# Altium PCB BACK1.1.PcbDoc
Units mil, origin at the board's own origin, x right, y up, seen from the top; angles counter-clockwise.
Board outline 3149.61 x 3149.61 mil, 2 copper layers (Top Layer, Bottom Layer); 22 components, 39 nets, 164 pads, 8 vias.
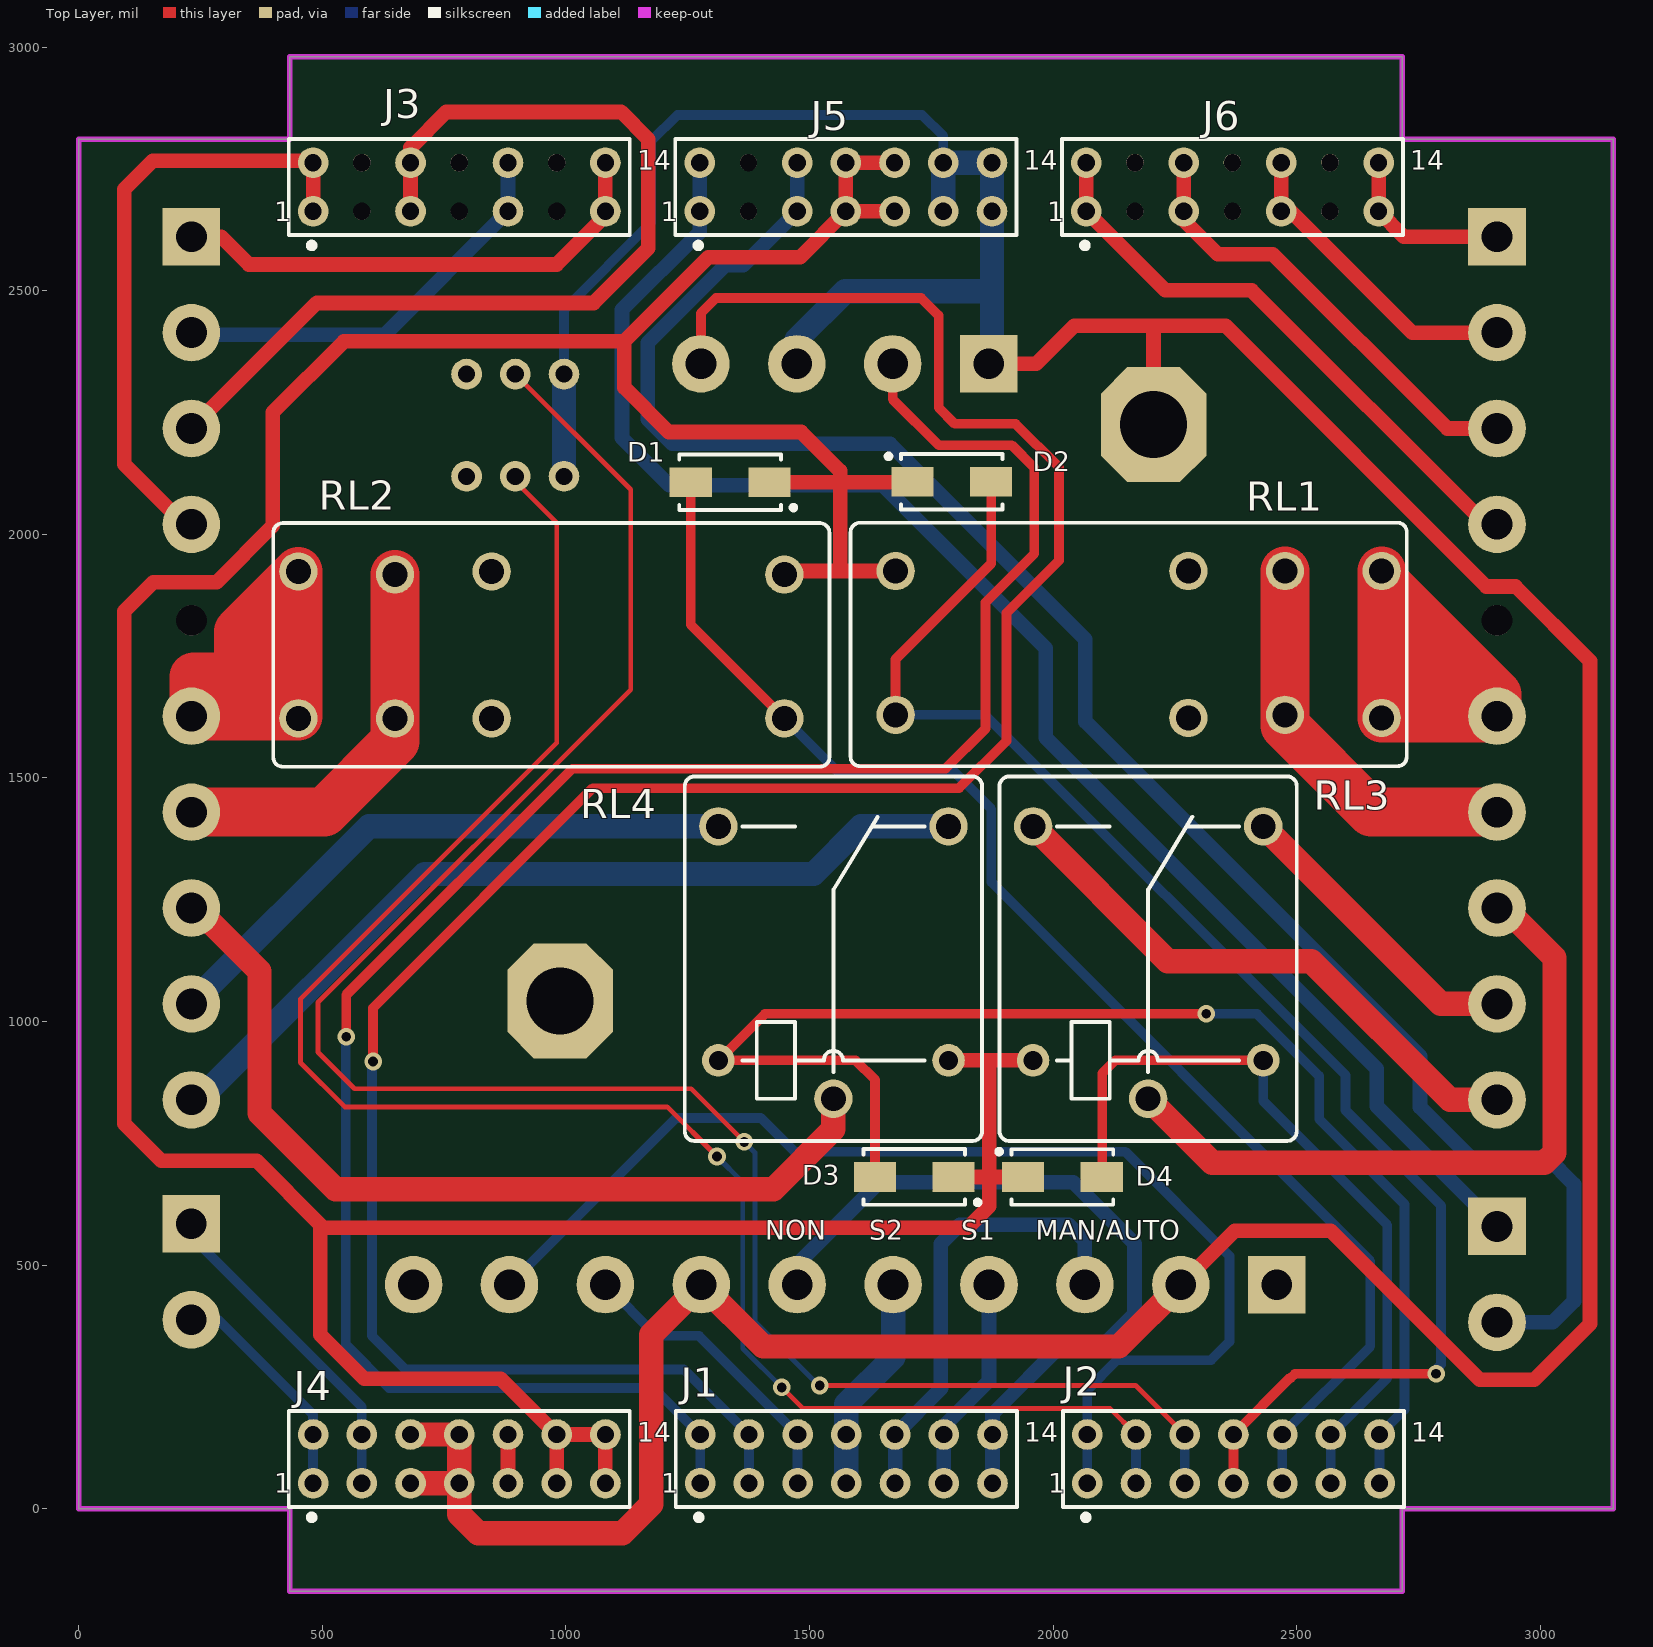
[diagram p0: Top Layer view]
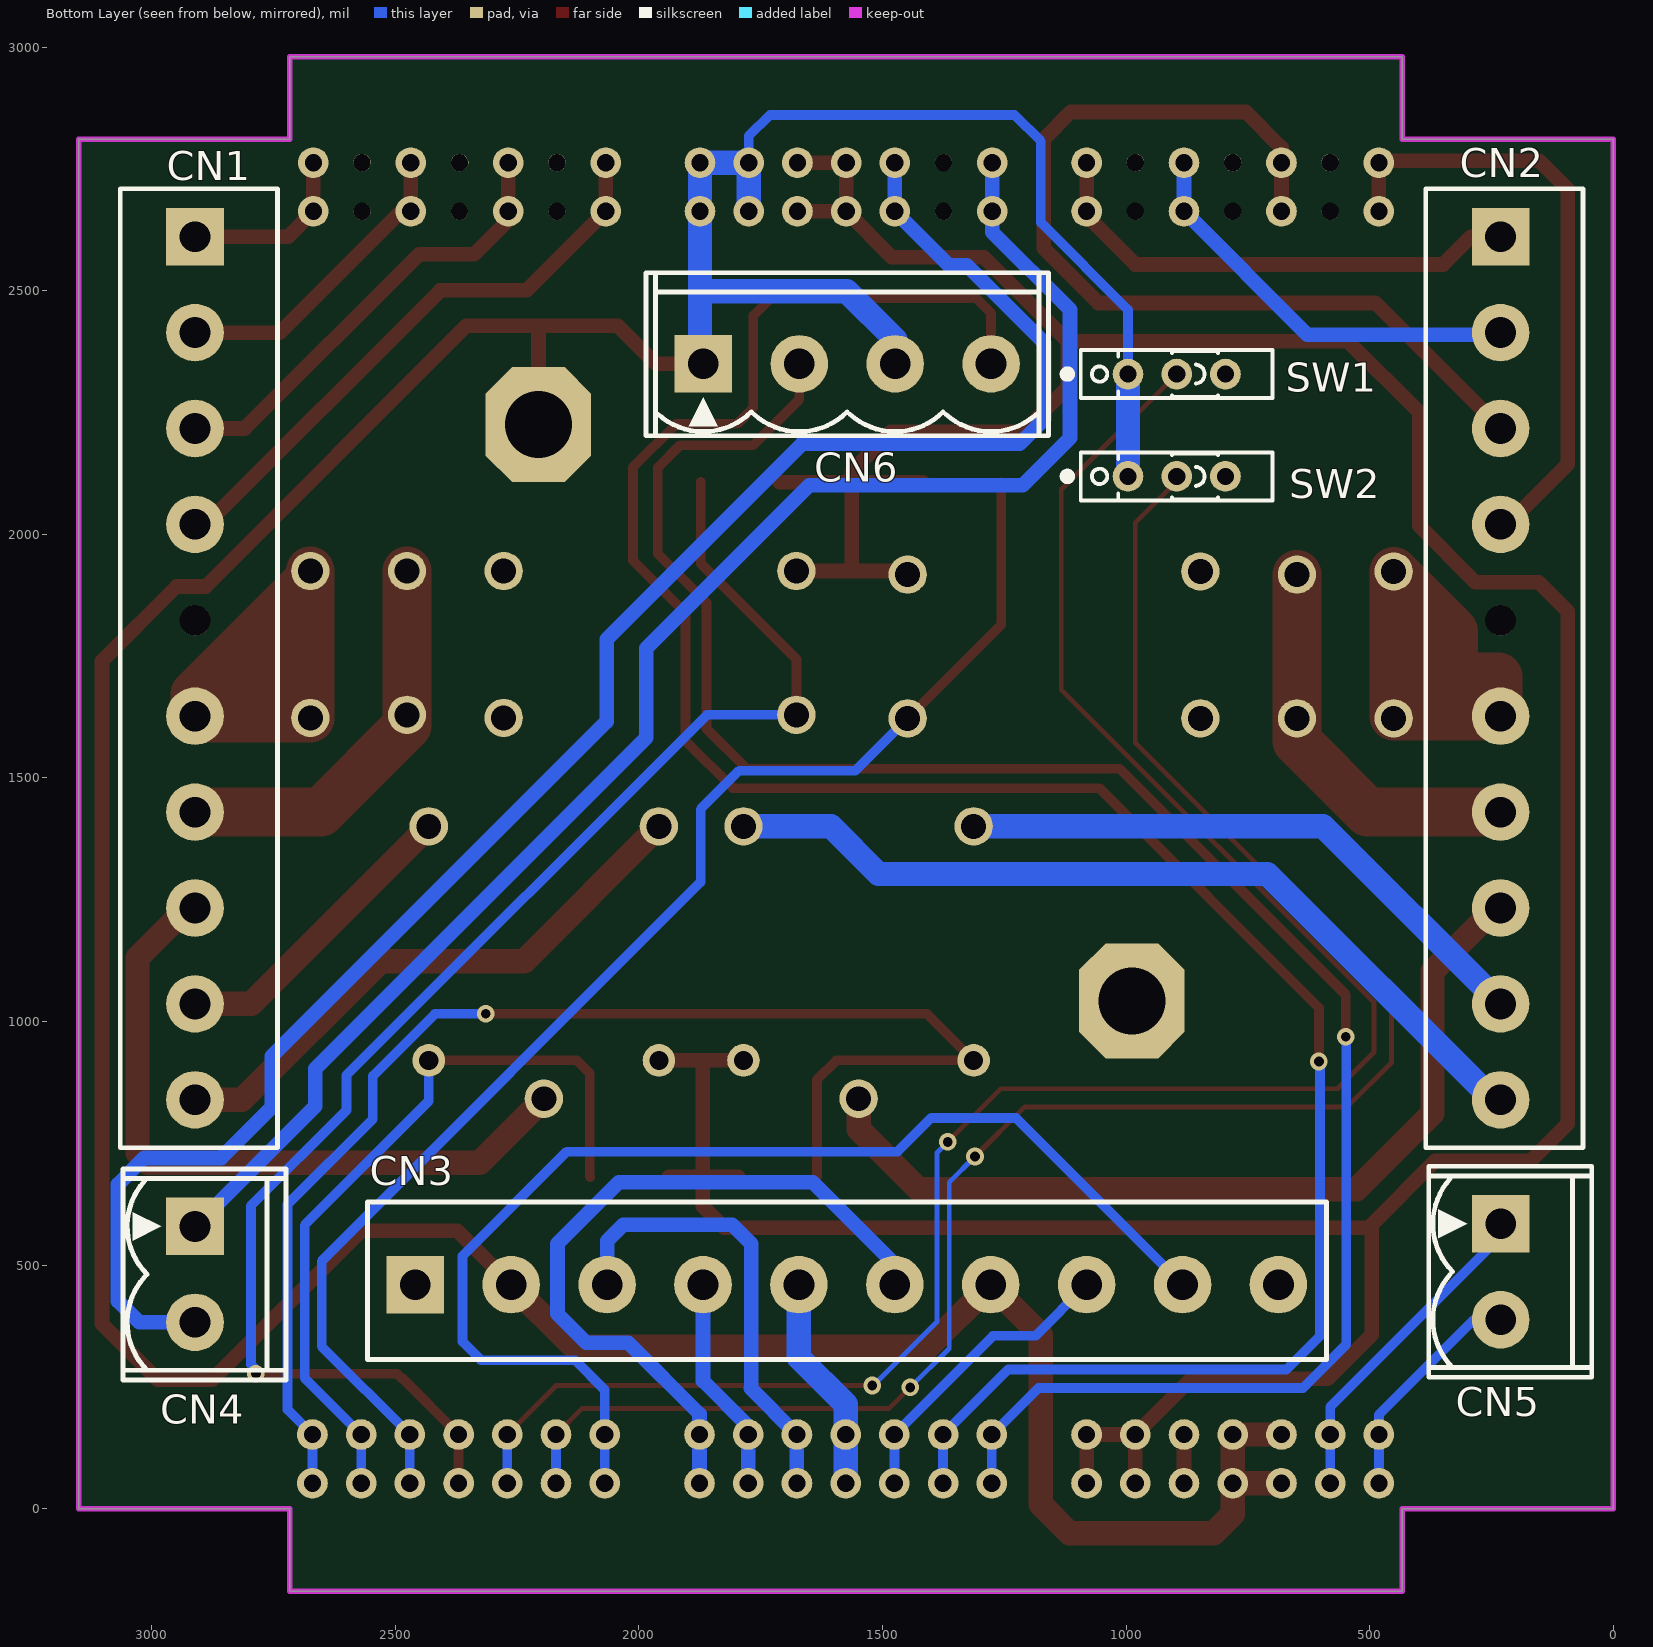
[diagram p1: Bottom Layer view, seen from below]
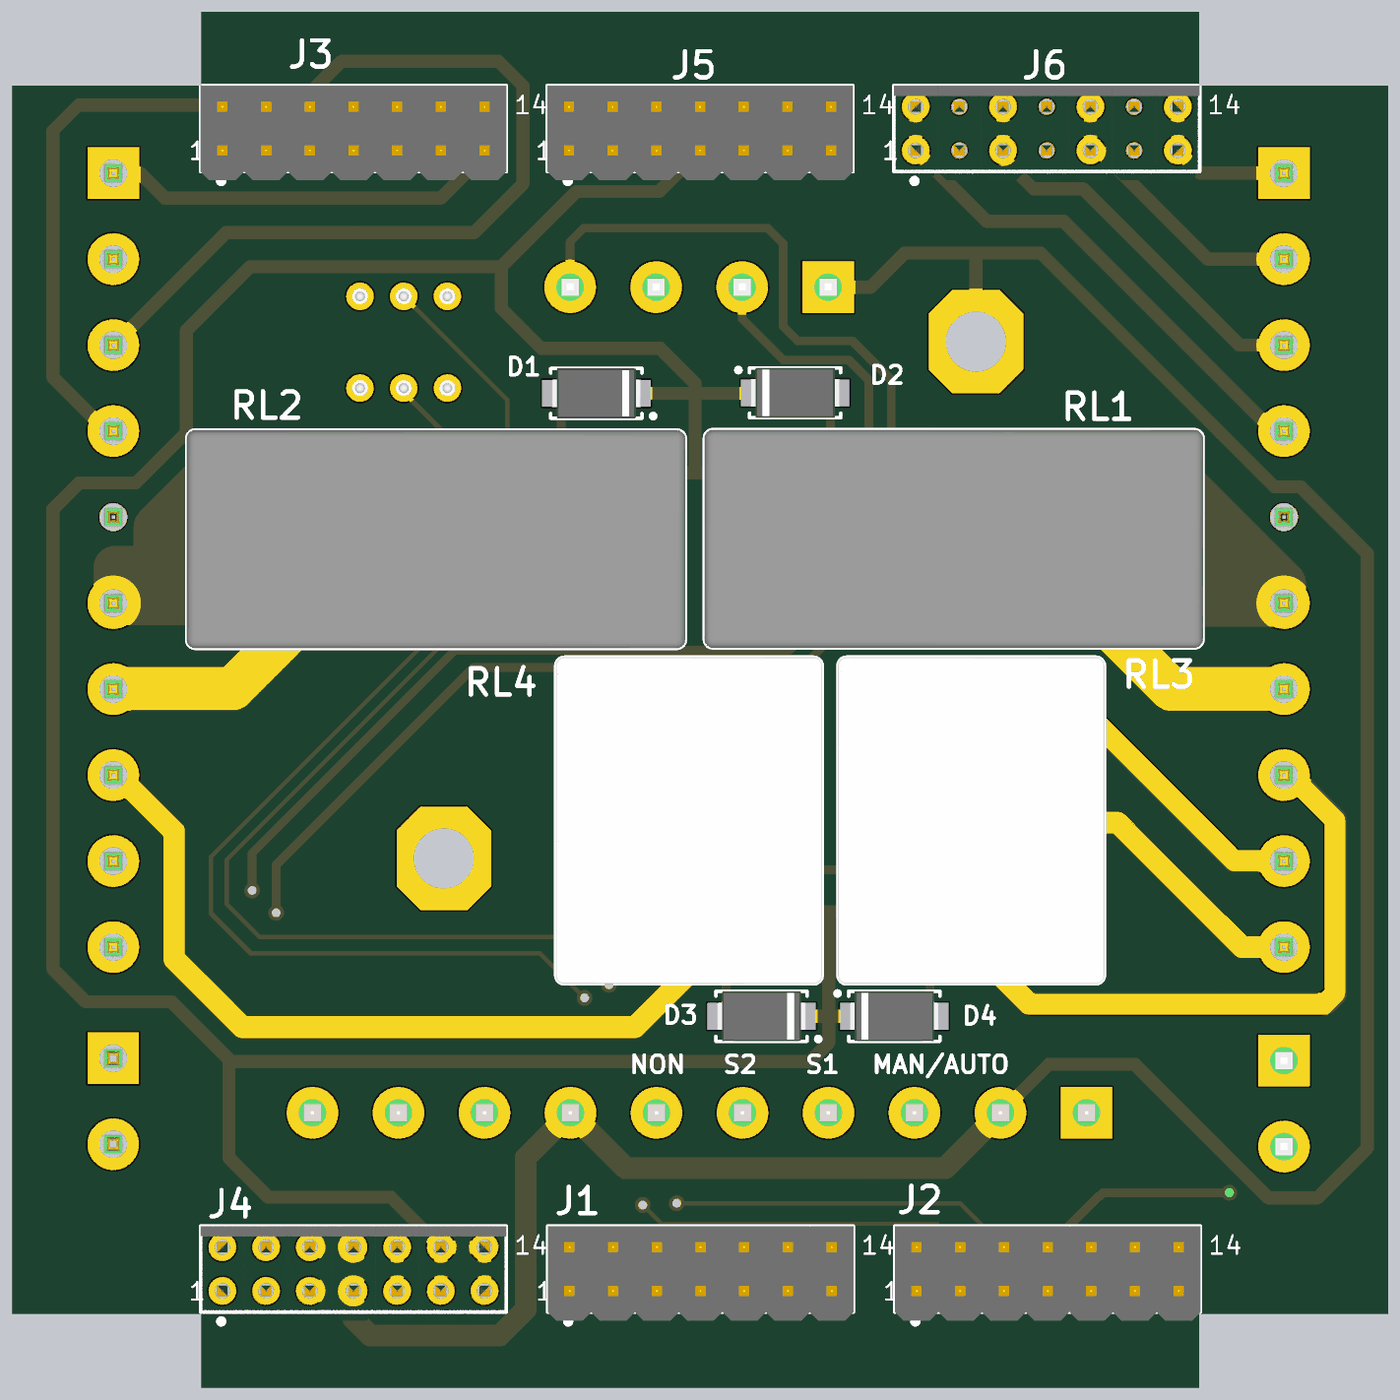
[diagram p2: 3D render of the assembled board from above, using the file's embedded part models]
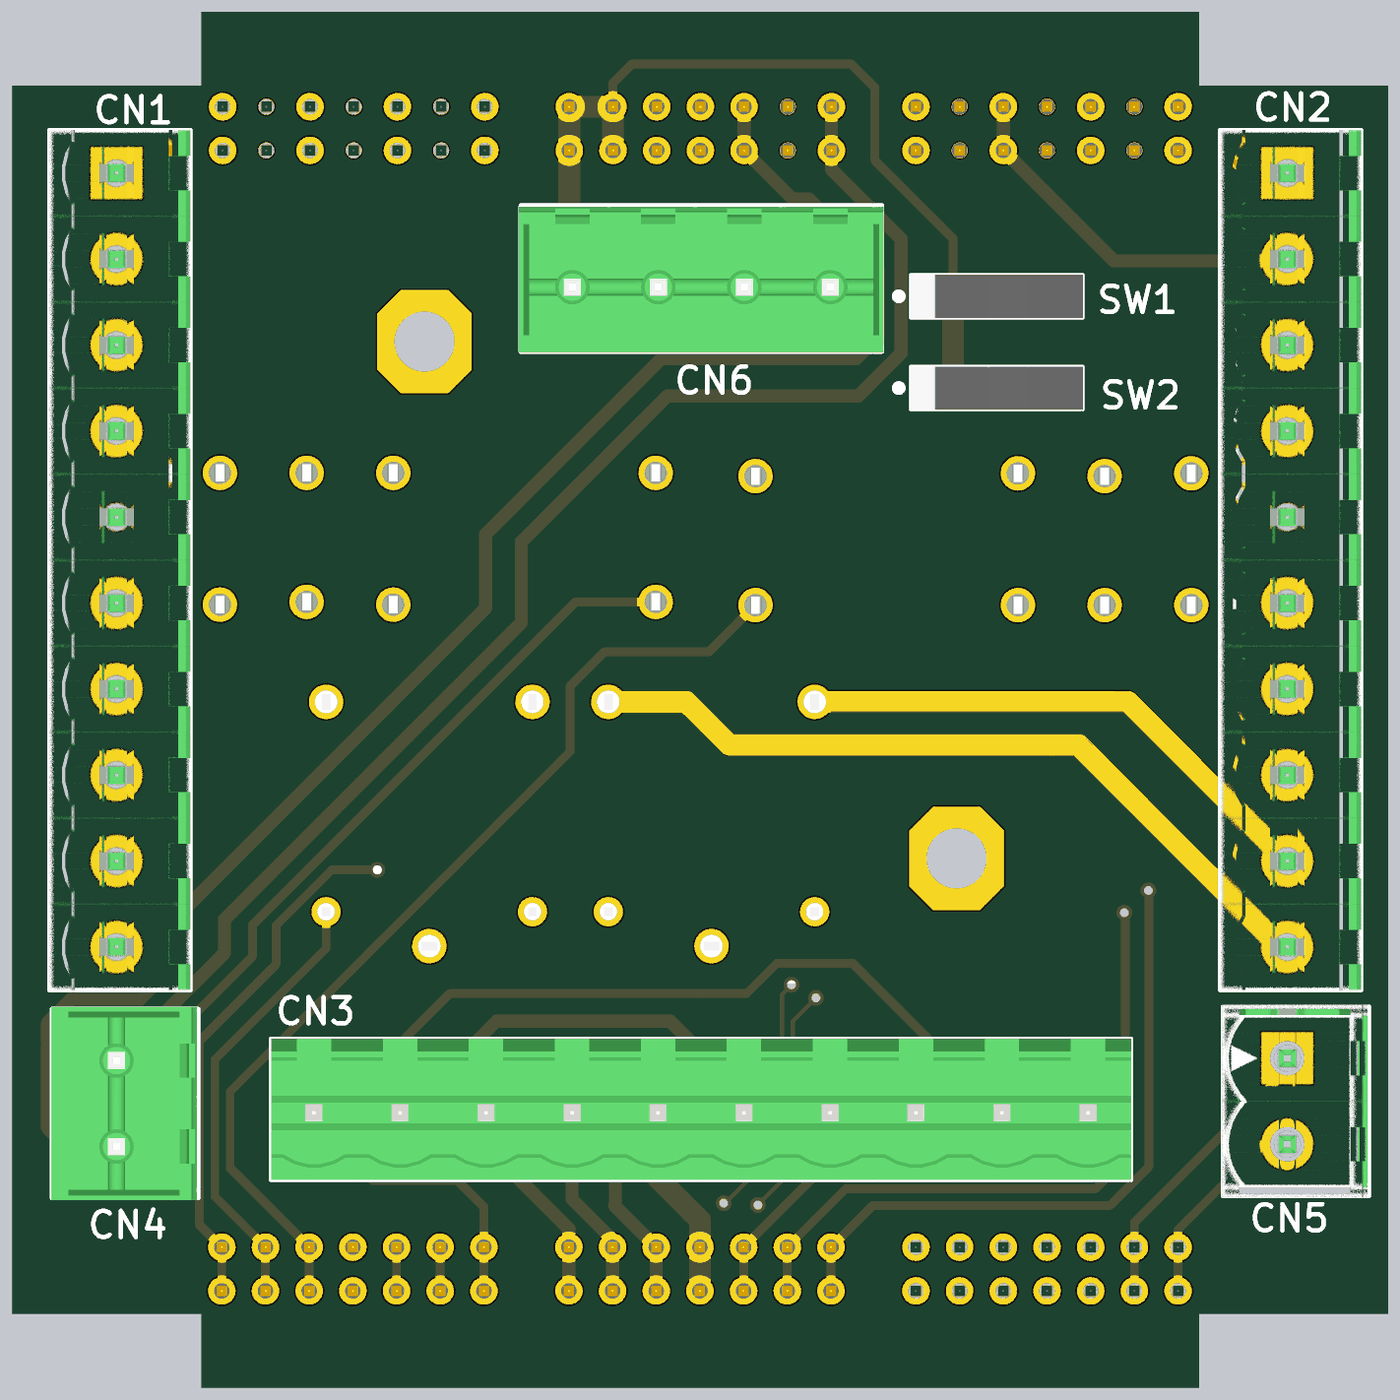
[diagram p3: 3D render of the assembled board from below, using the file's embedded part models]

## Layer stack, top to bottom
Top Solder: solder mask 0.4, Solder Resist, Dk 3.5
Top Layer: signal copper 1.4
Dielectric 1: dielectric 12.6, FR-4, Dk 4.8
Bottom Layer: signal copper 1.4
Bottom Solder: solder mask 0.4, Solder Resist, Dk 3.5

## Board outline
0,0 0,2811.02 433.07,2811.02 433.07,2980.31 2716.54,2980.31 2716.54,2811.02 3149.61,2811.02 3149.61,0 2716.54,0 2716.54,-169.29 433.07,-169.29 433.07,0

## Design rules (kind name [scope] priority, off if disabled: settings)
Clearance [All] p1: gap=15 ignorepadtopadclearanceinfootprint=FALSE
PolygonConnect [All] p1: connectstyle=Relief reliefconductorwidth=10 reliefentries=4 polygonreliefangle="90 Angle" airgapwidth=10
RoutingVias [All] p1: holewidth=28 width=50 viastyle="Through Hole" minholewidth=28 minwidth=50 maxholewidth=28 maxwidth=50
SolderMaskExpansion [All] p1: expansion=4
Width [All] p1: maxlimit=300 minlimit=10 preferedwidth=20
30 further rules are at their usual default settings.

## Components (designator, comment, footprint, x,y, rotation, side; value= is the part's Value field where it differs from the comment)
CN1 "2EDGV-5.0-10P-14-00A(H)" 0330-0097-8_2EDGV-5.0-10P-14-00A(H)#1 2910.98,2611.02 r270 bottom locked
CN2 "2EDGV-5.0-10P-14-00A(H)" 0330-0097-8_2EDGV-5.0-10P-14-00A(H)#1 231.26,2611.02 r270 bottom locked
CN3 "2EDGV-5.0-10P-14-00A(H)" 0330-0097-8_2EDGV-5.0-10P-14-00A(H)#2 2458.86,460 r180 bottom locked
CN4 "5EHDVC-2P" 0005-0113-3_5EHDVC-2P 2910.98,579.53 r270 bottom locked
CN5 "5EHDVC-2P" 0005-0113-3_5EHDVC-2P 231,584.85 r270 bottom locked
CN6 "Comment" 0005-0143-5_5EHDVC-4P 1867.55,2350 r180 bottom locked
D1 "M7" DIOM5027X244N 1337,2107 r180 top
D2 "M7" DIOM5027X244N 1792,2108 r0 top (schematic designator D1)
D3 "M7" DIOM5027X244N 1715,681 r180 top (schematic designator D1)
D4 "M7" DIOM5027X244N 2019,681 r0 top (schematic designator D1)
J1 "Header 14" COMATEL_389.0358.1.14.400#1 1575.5,102.36 r0 top locked
J2 "Header 14" COMATEL_389.0358.1.14.400#1 2370,102.36 r0 top locked
J3 "Header 14" COMATEL_389.0358.1.14.400#2 780.98,2712.99 r0 top locked
J4 "Header 14" COMATEL_389.0358.1.14.400#1 781,102.36 r0 top locked
J5 "Header 14" COMATEL_389.0358.1.14.400#3 1574.49,2712.99 r0 top locked
J6 "Header 14" COMATEL_389.0358.1.14.400#2 2368,2712.99 r0 top locked
RL1 "12VDC" REL_TYCO_SCHRACK_RT31XXXX 2155,1774 r0 top
RL2 "12VDC" REL_TYCO_SCHRACK_RT31XXXX 970,1773 r180 top
RL3 "5VDC" REL_FINDER_36.11 2195,1129 r90 top
RL4 "5VDC" REL_FINDER_36.11 1549,1129 r90 top
SW1 "Comment" SW_EAO_1K2-09.032 896,2329 r90 bottom
SW2 "Comment" SW_EAO_1K2-09.032 896,2119 r90 bottom

## Footprints (in the part's own frame and the unit in brackets; to place one, negate y for a bottom-side part, rotate by r counter-clockwise, add the part's x,y. Pads: shape width x height; smd on the part's side, far side on the other; paste and mask are expansions set on the pad)
0005-0113-3_5EHDVC-2P [mm] "Plug-in Terminal Block 2pins,Male,300V/15A  Pitch 5.00mm"
  rect 3x3 hole 1.6: 1(0,0)
  round 3 hole 1.6: 2(5,0)
  silkscreen extent -3,-3.75 8,4.75, body extent -3.1,-3.8 8.1,4.67, height 12.1
0005-0143-5_5EHDVC-4P [mm] "Plug-in Terminal Block 4pins,Male,300V/15A  Pitch 5.00mm"
  rect 3x3 hole 1.6: 1(0,0)
  round 3 hole 1.6: 2(5,0) 3(10,0) 4(15,0)
  silkscreen extent -3,-3.75 18,4.75, body extent -3.1,-3.8 18.1,4.67, height 12.1
0330-0097-8_2EDGV-5.0-10P-14-00A(H)#1 [mm] "Plug-in Terminal Block 10pins,Male,300V/15A  Pitch 5.0mm"
  rect 3x3 hole 1.6: 1(0,0)
  round 3 hole 1.6: 2(5,0) 3(10,0) 4(15,0) 6(25,0) 7(30,0) 8(35,0) 9(40,0) 10(45,0)
  round 1.575 hole 1.6: 5(20,0)
  silkscreen extent -2.5,-3.9 47.5,4.3, body extent -2.5,-3.9 47.5,4.3, height 12.2
0330-0097-8_2EDGV-5.0-10P-14-00A(H)#2 [mm] "Plug-in Terminal Block 10pins,Male,300V/15A  Pitch 5.0mm"
  rect 3x3 hole 1.6: 1(0,0)
  round 3 hole 1.6: 2(5,0) 3(10,0) 4(15,0) 5(20,0) 6(25,0) 7(30,0) 8(35,0) 9(40,0) 10(45,0)
  silkscreen extent -2.5,-3.9 47.5,4.3, body extent -2.5,-3.9 47.5,4.3, height 12.2
COMATEL_389.0358.1.14.400#1 [mm] "14 Contacts - Pitch 2.54mm - Dual Row Straight Strip Header - Insulator 1.7mm"
  round 1.6 hole 0.9: 1(-7.62,-1.27) 2(-7.62,1.27) 3(-5.08,-1.27) 4(-5.08,1.27) 5(-2.54,-1.27) 6(-2.54,1.27) 7(0,-1.27) 8(0,1.27) 9(2.54,-1.27) 10(2.54,1.27) 11(5.08,-1.27) 12(5.08,1.27) 13(7.62,-1.27) 14(7.62,1.27)
  silkscreen extent -8.89,-3.2 8.89,2.5, body extent -8.89,-3 8.89,2.5, height 8
COMATEL_389.0358.1.14.400#2 [mm] "14 Contacts - Pitch 2.54mm - Dual Row Straight Strip Header - Insulator 1.7mm"
  round 1.6 hole 0.9: 1(-7.62,-1.27) 2(-7.62,1.27) 5(-2.54,-1.27) 6(-2.54,1.27) 9(2.54,-1.27) 10(2.54,1.27) 13(7.62,-1.27) 14(7.62,1.27)
  round 0.889 hole 0.9: 3(-5.08,-1.27) 7(0,-1.27) 11(5.08,-1.27)
  round 0.914 hole 0.9: 4(-5.08,1.27) 8(0,1.27) 12(5.08,1.27)
  silkscreen extent -8.89,-3.2 8.89,2.5, body extent -8.89,-3 8.89,2.5, height 8
COMATEL_389.0358.1.14.400#3 [mm] "14 Contacts - Pitch 2.54mm - Dual Row Straight Strip Header - Insulator 1.7mm"
  round 1.6 hole 0.9: 1(-7.62,-1.27) 2(-7.62,1.27) 5(-2.54,-1.27) 6(-2.54,1.27) 7(0,-1.27) 8(0,1.27) 9(2.54,-1.27) 10(2.54,1.27) 11(5.08,-1.27) 12(5.08,1.27) 13(7.62,-1.27) 14(7.62,1.27)
  round 0.889 hole 0.9: 3(-5.08,-1.27) 4(-5.08,1.27)
  silkscreen extent -8.89,-3.2 8.89,2.5, body extent -8.89,-3 8.89,2.5, height 8
DIOM5027X244N [mm] "DO-214-AC/SMA  Molded Diode, Body 5.0x2.7mm, IPC Medium Density"
  rect 2.2x1.55 smd: 1(-2.05,0) 2(2.05,0)
  silkscreen extent -3.43,-1.45 2.65,1.45, body extent -2.6,-1.45 2.6,1.45, height 2.44
REL_FINDER_36.11 [mm] "5 Leads, Row Spacing 12 mm; Body 19mm x 15.5mm, 36 Serie"
  round 1.7 hole 1: 1(-5.3,-6) 2(-5.3,6)
  round 2 hole 1.3: 3(-7.3,0) 4(6.9,-6) 5(6.9,6)
  silkscreen extent -9.5,-7.75 9.5,7.75, body extent -9.5,-7.75 9.5,7.75, height 15.5
REL_TYCO_SCHRACK_RT31XXXX [mm] "8 Leads, Row Spacing 7.62 mm; Body 29mm x 12.7mm, TYCO RT Serie"
  round 2 hole 1.3: 11(8.15,-3.67) 11(8.15,3.83) 12(3.11,-3.83) 12(3.11,3.83) 14(13.19,-3.83) 14(13.19,3.83) A1(-12.15,-3.67) A2(-12.15,3.83)
  silkscreen extent -14.5,-6.35 14.5,6.35, body extent -14.5,-6.35 14.5,6.35, height 15.7
SW_EAO_1K2-09.032 [mm] "Body 10x2.5mm, SPDT Switch - PCB Mounting - EAO Series 1K2"
  round 1.6 hole 0.9: 1(0,0) 2(0,-2.54) 3(0,2.54)
  silkscreen extent -1.25,-5 1.25,5.9, body extent -1.25,-5 1.25,5, height 6.4

## Part data
CN1 CN2 CN3: library part 0330-0097-8_2EDGV-5.0-10P-14-00A(H), "Plug-in Terminal Block 10pins,Male,300V/15A  Pitch 5.0mm", ES Part Number=0330-0097-8, Manufacture=DEGSON, Drawing by="PCB Engineering", Part Number=2EDGV-5.0-10P-14-00A(H), Supply="Electronics Source Co.,Ltd."
CN4 CN5: library part 0005-0113-3_5EHDVC-2P, "Plug-in Terminal Block 2pins,Male,300V/15A  Pitch 5.00mm", ES Part Number=0005-0113-3, Manufacture=DINKLE, Drawing by="PCB Engineering", Part Number=5EHDVC-2P, Supply="Electronics Source Co.,Ltd."
D1 D2 D3 D4: library part ES1D, "0204-0002-4"
J1 J2 J3 J4 J5 J6: library part COMATEL_389.0358.1.14.400, "Connector 14 Male", Manufacturer="KONTEK COMATEL", Manufacturer Part Number=389.0358.1.14.400, Author="CERN DEM JLC", ComponentHeight=8mm, Component Type=Standard, CreateDate=10/4/2551, Family="Header 14", HelpURL=\\cern.ch\dfs\Applications\Altium\Datasheets\COMATEL_389.0358.1.14.400.pdf, LatestRevisionDate=10/4/2551, Mounted=Yes, Part Description="14 Contacts - Pitch 2.54mm - Dual Row Straight Strip Header - Insulator 1.7mm", Part Number=COMATEL_389.0358.1.14.400, Pin Count=14, SMD=No, Socket=No, Status=Obsolete, Table="STELVIO-KONTEK COMATEL"
RL1 RL2: library part REL_TYCO_SCHRACK_RT314012, "RT PCB Relay Form C (1 CO Contact)", Manufacturer="TYCO SCHRACK", Manufacturer Part Number="RT314012 or 9-1393239-5", Author="CERN DEM JLC", ComponentHeight=15.7mm, Component Type=Standard, CreateDate=15/2/2554, HelpURL=\\cern.ch\dfs\Applications\Altium\Datasheets\REL_TYCO_SCHRACK_RT314012.pdf, LatestRevisionDate=15/2/2554, Mounted=Yes, PackageDescription="8 Leads, Row Spacing 7.62 mm; Body 29mm x 12.7mm, TYCO RT Serie", Part Description="16A SPDT Power PCB Relay, RT1 Serie", Part Number=REL_TYCO_SCHRACK_RT314012, Pin Count=8, SMD=No, Socket=No, Status=None, Table=Relays
RL3 RL4: library part REL_FINDER_36.11.9.005.4001, "10A SPDT PCB Relay, 36 Serie", Manufacturer=FINDER, Manufacturer Part Number=36.11.9.005.4001, Author="CERN DEM JLC", ComponentHeight=15.5mm, Component Type=Standard, CreateDate=4/2/2556, HelpURL=\\cern.ch\dfs\Applications\Altium\Datasheets\REL_FINDER_36.11.pdf, LatestRevisionDate=4/2/2556, Mounted=Yes, PackageDescription="5 Leads Relay, Row Spacing 12 mm; Body 19mm x 15.5mm, 36 Serie", Part Description="10A SPDT Miniature PCB Relay, 36 Serie", Part Number=REL_FINDER_36.11.9.005.4001, Pin Count=5, SMD=No, Socket=No, Status=None, Table=Relays
SW1 SW2: library part SW_EAO_09.03290.01

## Free pads (board coordinates)
  oct 216.54x236.22 hole 137.8: 0(987.99,1042.36) 0(2205.98,2225.35)

## Via types
v1: diameter 36, hole 20, Top Layer to Bottom Layer, tented both sides, 8 vias

## Nets (pads, with @x,y where several pads share a name; then routed paths per layer and width w, separated by ;. In a path a pad name is that pad's centre, name@x,y a point inside that pad or via, vN(x,y) a via of type N, cw(c..) or ccw(c..) an arc to the next point about the centre after c; other vN are vias at no path point)
3.3V: J4.9 J4.10 | length 100
  Top Layer w30: J4.9 J4.10
+12: D1.1 D2.1 D3.1 D4.1 J4.11 J4.12 J4.13 J4.14 J5.7 J5.8 J5.9 J5.10 RL1.A2 RL2.A1 RL3.2 RL4.1 | length 8238.1
  Top Layer w30: 496,583 365,714 169,714 93,790 93,1842 153,1902 283,1902 398.5,2017.5 398.5,2250.5 544.5,2396.5 1119.5,2396.5 ; J4.11 J4.12 ; J4.13 J4.14 J4.12 ; D1.1 1563,2107 ; RL2.A1 1455.65,1924.79 1563,1924.79 ; J5.9 J5.7 ; J5.10 J5.8 J5.7 ; RL1.A2 1563,1924.79 ; D2.1 1710.29,2107 1563,2107 ; RL4.1 1875,920.34 ; D3.1 1865,681 ; D4.1 1869,681 ; RL3.2 1875,920.34 ; J4.12 866.36,267 586,267 496,357 496,580 499,577 1825,577 1869,621 1869,681 ; 1119.5,2396.5 1119.5,2301.5 1211,2210 1483,2210 1563,2130 1563,2107 ; 1119.5,2396.5 1292,2569 1480.5,2569 J5.7 ; 1563,1924.79 1563,2107 ; 1869,681 1869,914.34 1875,920.34
batt+: CN4.1 J5.1 J5.2 | length 3250
  Bottom Layer w30: J5.2 J5.1 1274.49,2620.49 1115,2461 1115,2198 1212,2101 1650,2101 1984.5,1766.5 1984.5,1582.5 2664,903 2664,826.51 CN4.1
batt-: CN4.2 J5.5 J5.6 | length 3803.1
  Bottom Layer w30: J5.6 J5.5 1363.5,2552 1327,2552 1168,2393 1168,2236 1218,2186 1665,2186 2066,1785 2066,1616 2753,929 2753,824 2857,720 3015,720 3069,666 3069,426 3025.68,382.68 CN4.2
btn_AU/MAN: CN3.3 J1.9 J1.10 | length 947.6
  Bottom Layer w30: J1.9 J1.10 1770.57,247.43 1769,249 1769,544 1808,583 2032,583 2065.16,549.84 CN3.3
btn_DW: CN3.6 J1.13 J1.14 | length 1518.7
  Bottom Layer w30: CN3.6 1474.61,501.61 1643,670 2041,670 2167,544 2167,400 2108,341 2022,341 1875.5,194.5 J1.14 J1.13
btn_EN: CN3.4 J1.11 J1.12 | length 446.1
  Bottom Layer w30: J1.11 J1.12 1775.5,169.5 1868.31,262.31 CN3.4
btn_UP: CN3.5 J1.7 J1.8 | length 453.1
  Bottom Layer w50: J1.7 J1.8 1575.5,214.5 1671.46,310.46 CN3.5 CN3.5@1675.5,455.96
CMD_OUT1: J2.5 J2.6 SW1.1 | length 4163.4
  Top Layer w10: SW1.1 1133,2092 1133,1681.43 491,1039.43 491,937 566,862 1257,862 v1(1366,753) ; v1(1521,253) 2169.36,253 J2.6
  Bottom Layer w10: v1(1366,753) 1388,731 1388,384 1519,253 v1(1521,253)
  Bottom Layer w20: J2.5 J2.6
CMD_OUT2: J2.3 J2.4 SW2.1 | length 3787.1
  Top Layer w10: SW2.1 896,2109 981,2024 981,1572 455,1046 455,916 546,825 1208,825 v1(1310,723) ; v1(1443,249) 1486,206 2116.36,206 J2.4
  Bottom Layer w10: v1(1310,723) 1363,670 1363,329 v1(1443,249)
  Bottom Layer w20: J2.3 J2.4
COM_AUX1: CN1.8 RL3.3 | length 1457.5
  Top Layer w30: CN1.8 CN1.8@2926.93,1233.07
  Top Layer w50: RL3.3 2326.6,710 3008,710 3029,731 3029,1131 CN1.8@2926.93,1233.07
COM_AUX2: CN2.8 RL4.3 | length 1840.8
  Top Layer w50: CN2.8 240.93,1233.07 371,1103 371,812 527,656 1426,656 1549,779 RL4.3
COM_S1: CN1.7 RL1.11 | length 826.2
  Top Layer w100: RL1.11@2475.87,1924.79 2475.87,1629.51 2475.87,1607.13 2653.08,1429.92 CN1.7
COM_S2: CN2.7 RL2.11 | length 820.4
  Top Layer w100: CN2.7 503.92,1429.92 649.13,1575.13 649.13,1622.21 RL2.11@649.13,1917.49
GND: CN3.2 CN3.7 CN6.1 CN6.3 J4.5 J4.6 J4.7 J4.8 J5.11 J5.12 J5.13 J5.14 pad.0@2205.98,2225.35 SW1.3 SW2.3 | length 9138.3
  Top Layer w30: CN6.1 1965,2350 2043,2428 2210,2428 ; pad.0@2205.98,2225.35 2205.98,2423.98 2210,2428 ; CN3.2 2373.01,571 2570,571 2876,265 2987,265 3102,380 3102,1740 2949,1893 2889,1893 2354,2428 2210,2428
  Top Layer w50: J4.5 J4.7 ; J4.6 J4.8 J4.7 ; CN3.2 2135.01,333 1404.76,333 CN3.7 1175,357.24 1175,9 1116,-50 820,-50 781,-11 J4.7
  Bottom Layer w20: SW1.3 996,2461 1175,2640 1175,2807 1229,2861 1731,2861 1774.49,2817.51 J5.12
  Bottom Layer w50: SW2.3 SW1.3 ; CN6.3@1473.85,2326.15 CN6.3 1473.85,2399.85 1573,2499 1874.49,2499 ; J5.11 J5.12 J5.14@1867.55,2762.99 ; CN6.1 1874.49,2356.94 1874.49,2499 ; J5.14 J5.13 1874.49,2499
IN_1: CN6.2 J1.1 J1.2 | length 4155.7
  Top Layer w20: v1(549,969) 549,1055 1013,1519 1779,1519 1861,1601 1861,1860 1961,1960 1961,2137 1915,2183 1765,2183 1670.7,2277.3 CN6.2
  Bottom Layer w20: v1@548,966 548,337 637,248 1179.86,248 J1.2 J1.1
IN_2: CN6.4 J1.3 J1.4 | length 4866.9
  Top Layer w20: v1@603,913 604,914 v1(604,918) 604,1028 1055,1479 1807,1479 1904,1576 1904,1838.5 2012,1946.5 2012,2138 1923,2227 1798,2227 1765,2260 1765,2449 1729,2485 1308,2485 1277,2454 CN6.4
  Bottom Layer w20: v1@602,909 602,355 671,286 1241.86,286 J1.4 J1.3
IN_3: CN3.8 J1.5 J1.6 | length 622
  Bottom Layer w20: CN3.8 1185.91,355 1272.86,355 J1.6 J1.5
IN_4: CN3.9 J2.1 J2.2 | length 2437.5
  Bottom Layer w20: CN3.9 1226.05,802 1400,802 1469,733 2148,733 2362,519 2362,343 2324,305 2131,305 2070,244 J2.2 J2.1
NC_AUX1: CN1.10 RL3.5 | length 1184.7
  Top Layer w50: RL3.5 2235.43,1124 2530,1124 2814.63,839.37 CN1.10
NC_AUX2: CN2.9 RL4.5 | length 1232.5
  Bottom Layer w50: CN2.9 595.69,1400.66 RL4.5
Neutral_S1: CN1.4 J6.1 J6.2 | length 1209.1
  Top Layer w30: J6.2 J6.1 2229.99,2501 2407,2501 2887.53,2020.47 CN1.4
Neutral_S2: CN2.4 J3.1 J3.2 | length 1263.4
  Top Layer w30: CN2.4 216.53,2020.47 93,2144 93,2708 152,2767 470,2767 480.98,2756.02 J3.1
NO_AUX1: CN1.9 RL3.4 | length 630.7
  Top Layer w50: RL3.4 2795.66,1036.22 CN1.9
NO_AUX2: CN2.10 RL4.4 | length 1786.5
  Bottom Layer w50: CN2.10 246.37,839.37 710,1303 1508,1303 1605.66,1400.66 RL4.4
NO_RLY1: CN1.6 RL1.14 | length 919.7
  Top Layer w100: RL1.14@2674.29,1924.79 RL1.14@2674.29,1908.71 ; RL1.14@2674.29,1908.71 2674.29,1623.21 2907.43,1623.21 CN1.6 2910.98,1672.02 RL1.14@2674.29,1908.71
RELAY_Fault1: D4.2 J2.11 J2.12 RL3.1 | length 1576.2
  Top Layer w20: D4.2 2101,682.29 2101,894 2127.34,920.34 RL3.1
  Bottom Layer w20: RL3.1 2431.22,836.78 2686,582 2686,268.36 J2.12 J2.11
RELAY_Fault2: D3.2 J2.13 J2.14 RL4.2 | length 2792.9
  Top Layer w20: D3.2 1634.29,880.71 1594.66,920.34 RL4.2 1408.44,1016 v1(2314,1016)
  Bottom Layer w20: v1(2314,1016) 2418.24,1016 2546,888.24 2546,800 2721,625 2721,203.36 J2.14 J2.13
RELAY_S1: D2.2 J2.7 J2.8 RL1.A1 | length 3056.1
  Top Layer w20: RL1.A1 1676.65,1743.65 1872.71,1939.71 D2.2 ; J2.7 J2.8 2486.64,269 2487.64,268 2496.64,277 v1(2786,277)
  Bottom Layer w20: RL1.A1 1860.49,1629.51 2600,890 2600,818 2796,622 2796,296 2786,286 v1(2786,277)
RELAY_S2: D1.2 J2.9 J2.10 RL2.A2 | length 2847
  Top Layer w20: D1.2 1256.29,1814.27 RL2.A2
  Bottom Layer w20: RL2.A2 1555.56,1515 1794,1515 1873,1436 1873,1286 2651,508 2651,333.36 J2.10 J2.9
RLY2_NO: CN2.6 RL2.14 | length 940.3
  Top Layer w100: CN2.6 450.71,1626.77 450.71,1923.79 327.76,1800.84 327.76,1708 236,1708 236,1661 CN2.6@249,1648
RS485_A: CN5.2 J4.1 J4.2 | length 471.4
  Bottom Layer w20: CN5.2 286,388 481,193 J4.2 J4.1
RS485_B: CN5.1 J4.3 J4.4 | length 677.5
  Bottom Layer w20: CN5.1 231,559 581,209 J4.4 J4.3
S1_L1: CN1.1 J6.13 J6.14 | length 364.5
  Top Layer w30: J6.14 J6.13 2719.97,2611.02 CN1.1
S1_L2: CN1.2 J6.9 J6.10 | length 646
  Top Layer w30: J6.10 J6.9 2488.01,2662.99 2736.83,2414.17 CN1.2
S1_L3: CN1.3 J6.5 J6.6 | length 938.1
  Top Layer w30: J6.6 J6.5 2268,2645 2338,2575 2451,2575 2808.68,2217.32 CN1.3
S2_L1: CN2.1 J3.13 J3.14 | length 1023.8
  Top Layer w30: CN2.1 291.98,2611.02 349,2554 981,2554 1080.98,2653.98 J3.13 J3.14
S2_L2: CN2.2 J3.9 J3.10 | length 856.2
  Bottom Layer w30: CN2.2 235.43,2410 627.99,2410 J3.9 J3.10
S2_L3: CN2.3 J3.5 J3.6 | length 1987.3
  Top Layer w30: CN2.3 488.94,2475 1057,2475 1169,2587 1169,2811 1113,2867 754,2867 680.98,2793.98 J3.6 J3.5
pads on no net: CN1.5 CN2.5 CN3.1 CN3.10 J3.3 J3.4 J3.7 J3.8 J3.11 J3.12 J5.3 J5.4 J6.3 J6.4 J6.7 J6.8 J6.11 J6.12 RL1.12 RL2.12 SW1.2 SW2.2

## Keep-outs
Keep-Out Layer:
  the board outline again, w12.01

## Other copper
Top Layer:
  region net RLY2_NO: 311,1814 349,1852 468,1852 468,1707 401,1640 400,1641 312,1641
  region net NO_RLY1: 2673,1868 2873,1668 2873,1633 2721,1633 2678,1676
  region net NO_RLY1: 2673,1940

## Silkscreen, mask and mechanical layers (free items; w line width, h text height)
Top Overlay:
  text "NON" at 1409,552 h40
  text "S2" at 1623,552 h40
  text "S1" at 1811,552 h40
  text "MAN/AUTO" at 1964,552 h40
Top Solder:
  lines w50: 231.26,1233.07 241.93,1233.07 370,1105 370,813 527,656 1425,656 1549,780 1549,841.6 ; 1960,1393 1968,1393 2236,1125 2530,1125 2815.63,839.37 2910.98,839.37 ; 2199,831 2207,831 2331,707 2998,707 3026,735 3026,1125 3026,1129 2905,1250 ; 2431.22,1400.66 2436.34,1400.66 2799,1038 2931,1038
  lines w100: 231.26,1432 505,1432 649.13,1576.13 649.13,1917.49 ; 2475.87,1924.79 2475.87,1605.13 2651.08,1429.92 2910.98,1429.92
Bottom Solder:
  lines w50: 231.26,1036.22 231.26,1038.26 597,1404 1309.43,1404 ; 240,840 246,840 707,1301 1508,1301 1608,1401 1798,1401

## Text inside footprints (layer, text, board x,y; h text height)
J1: Top Overlay "14" at 1940.5,137.36 h40; Top Overlay "1" at 1195.5,32.36 h40
J2: Top Overlay "14" at 2735,137.36 h40; Top Overlay "1" at 1990,32.36 h40
J3: Top Overlay "1" at 400.98,2642.99 h40; Top Overlay "14" at 1145.98,2747.99 h40
J4: Top Overlay "14" at 1146,137.36 h40; Top Overlay "1" at 401,32.36 h40
J5: Top Overlay "14" at 1939.49,2747.99 h40; Top Overlay "1" at 1194.49,2642.99 h40
J6: Top Overlay "14" at 2733,2747.99 h40; Top Overlay "1" at 1988,2642.99 h40